# Altium PCB lagd_pcb.PcbDoc (part 5 of 7)
Units mm, origin at the board's own origin, x right, y up, seen from the top; angles counter-clockwise.
Board outline 172 x 145 mm, 6 copper layers (Top Layer, Layer 1, Layer 2, Layer 3, Layer 4, Bottom Layer), stack 0.816 mm thick; 588 components, 338 nets, 2165 pads, 565 vias.
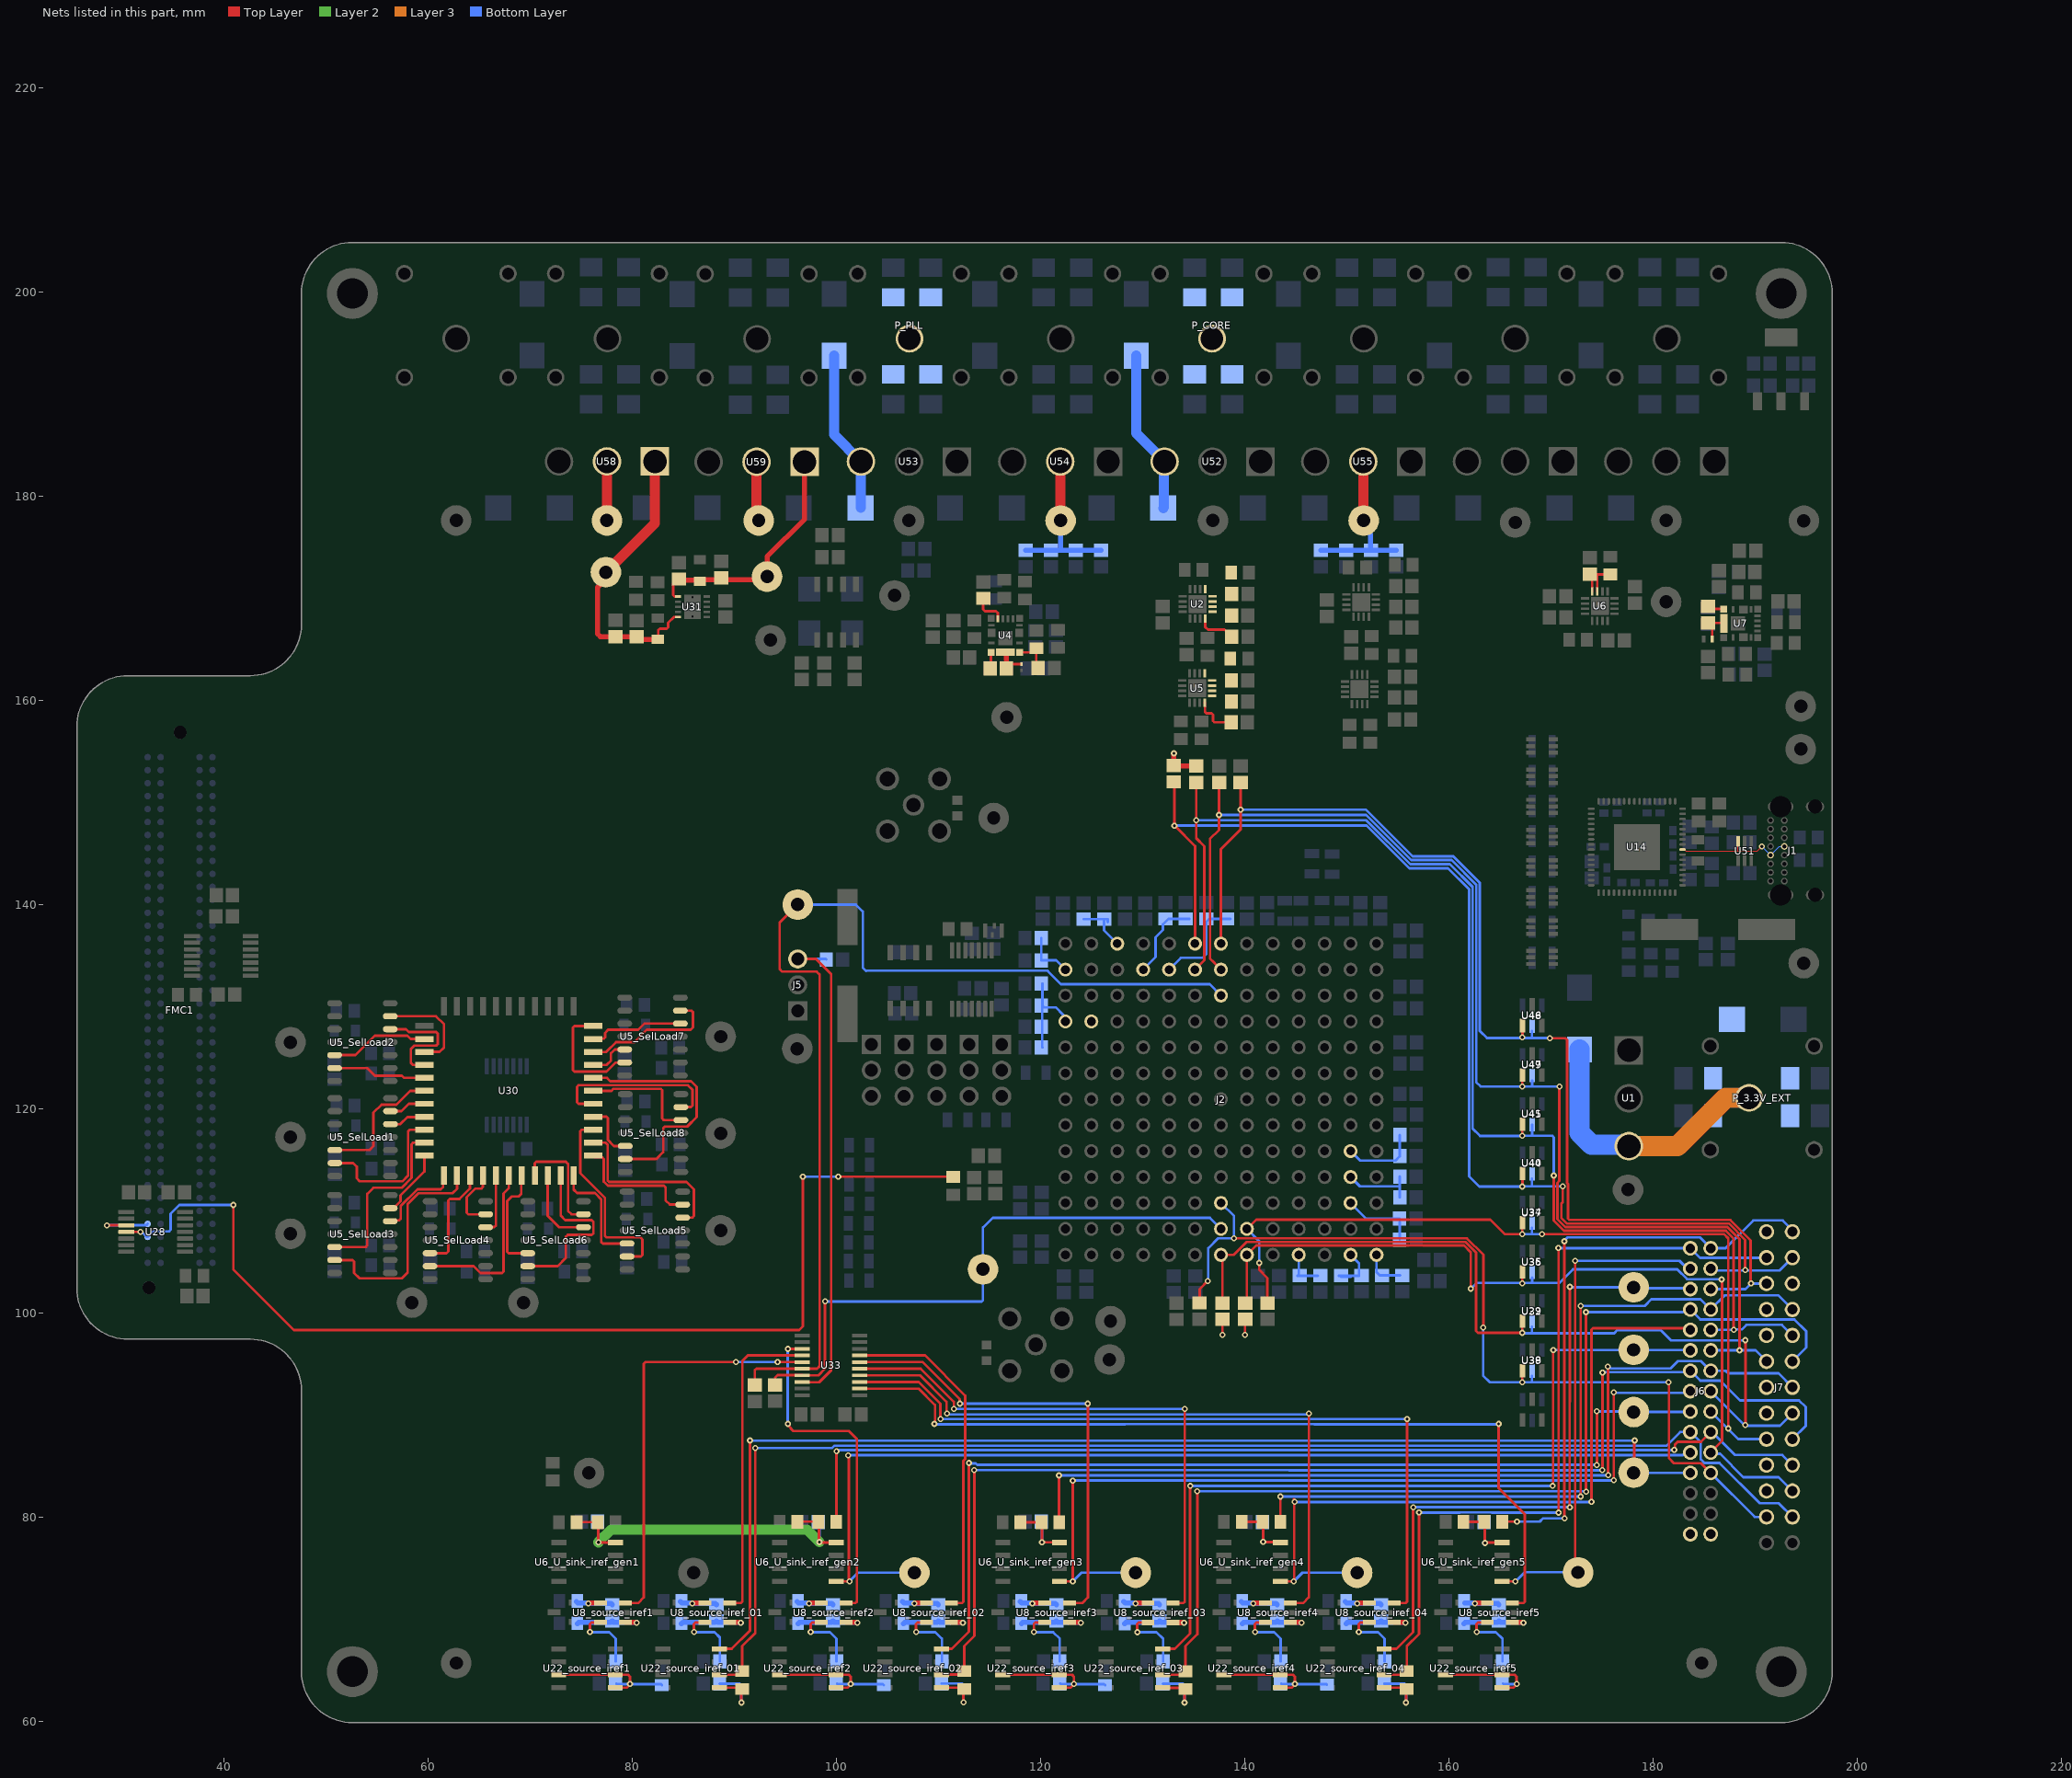
[diagram p8: the nets of this part, all layers, seen from the top]

## Via types
v1: diameter 0.6, hole 0.3, Top Layer to Bottom Layer, tented both sides, 505 vias
v2: diameter 0.3, hole 0.3, Top Layer to Bottom Layer, 20 vias
v3: diameter 0.55, hole 0.3, Top Layer to Bottom Layer, tented both sides, 18 vias
v4: diameter 0.55, hole 0.2, Top Layer to Bottom Layer, 16 vias
v5: diameter 0.6/0.6/0.6/0.6/0.6/0.6 (per signal layer), hole 0.3, Top Layer to Bottom Layer, tented both sides, 2 vias
v6: diameter 0.55/0.55/0.55/0.55/0.55/0.55 (per signal layer), hole 0.3, Top Layer to Bottom Layer, tented both sides, 2 vias
v7: diameter 1, hole 0.5, Top Layer to Bottom Layer, tented both sides, 2 vias

## Nets (pads, with @x,y where several pads share a name; then routed paths per layer and width w, separated by ;. In a path a pad name is that pad's centre, name@x,y a point inside that pad or via, vN(x,y) a via of type N, cw(c..) or ccw(c..) an arc to the next point about the centre after c; other vN are vias at no path point) (continued)
D_P: J1.4 J1.13 U14.8 U51.6 | length 11.8
  Top Layer w0.11: U14.8@182.893,145.385 183.096,145.385 183.227,145.254 188.325,145.254 188.326,145.255 U51.6@188.326,146.183 ; 188.327,145.254 190.229,145.254 v5(190.65,145.675)
  Bottom Layer w0.11: v5(190.65,145.675) 190.665,145.675 191.501,144.84 J1.4@191.516,144.84 192.366,145.69 J1.13@192.866,145.69
DAC_CS*: FMC1.H38 R40.2 U28.4 | length 107.1
  Top Layer w0.25: U28.4@30.372,107.931 30.375,107.928 31.797,107.928 v1(31.8,107.925) ; v1(40.9,110.575) 40.9,104.25 46.825,98.325 96.35,98.325 96.7,98.675 v1(96.7,113.35) ; v1(100.169,113.331) 111.401,113.331 R40.2@111.417,113.314
  Bottom Layer w0.25: v1(31.8,107.925) 31.895,107.925 32.012,107.808 32.04,107.808 32.406,107.442 FMC1.H38@32.512,107.442 33.057,107.987 34.615,107.987 34.762,108.133 34.762,109.712 35.625,110.575 v1(40.9,110.575) ; v1(96.7,113.35) 96.709,113.341 100.159,113.341 v1(100.169,113.331)
DAC_O1: U8_source_iref5.3 U33.2 | length 85
  Top Layer w0.25: U33.2@102.275,92.575 108.05,92.575 109.65,90.975 109.65,89.188 v1(109.587,89.125) ; v1(164.875,89.125) 164.875,82.837 167.437,80.275 167.437,71.716 167.291,71.57 U8_source_iref5.3@166.202,71.57
  Bottom Layer w0.25: v1(109.587,89.125) 109.637,89.075 128.256,89.075 128.281,89.1 146.787,89.1 146.812,89.075 164.825,89.075 v1(164.875,89.125)
DAC_O2: U8_source_iref_04.3 U33.3 | length 75.2
  Top Layer w0.25: U33.3@102.275,93.225 108.064,93.225 110.175,91.114 110.175,89.624 v1(110.199,89.6) ; U8_source_iref_04.3@154.652,71.57 155.748,71.57 155.895,71.716 155.895,89.595 v1(155.9,89.6)
  Bottom Layer w0.25: v1(110.199,89.6) v1(155.9,89.6)
DAC_O3: U8_source_iref4.3 U33.4 | length 66.3
  Top Layer w0.25: U33.4@102.275,93.875 108.175,93.875 110.775,91.275 110.775,90.191 v1(110.841,90.125) ; U8_source_iref4.3@144.477,71.57 145.72,71.57 146.275,72.125 v1(146.275,90.125)
  Bottom Layer w0.25: v1(110.841,90.125) 110.908,90.058 146.208,90.058 v1(146.275,90.125)
DAC_O4: U8_source_iref_03.3 U33.5 | length 53.9
  Top Layer w0.25: U33.5@102.338,94.525 108.25,94.525 111.495,91.28 v1(111.495,90.583) ; U8_source_iref_03.3@132.953,71.567 133.979,71.567 134.125,71.714 v1(134.125,90.583)
  Bottom Layer w0.25: v1(111.495,90.583) v1(134.125,90.583)
DAC_O5: U8_source_iref3.3 U33.6 | length 45.3
  Top Layer w0.25: U33.6@102.275,95.175 108.45,95.175 112.075,91.55 112.075,91.12 v1(112.087,91.108) ; U8_source_iref3.3@122.827,71.57 124.07,71.57 124.625,72.125 v1(124.625,91.108)
  Bottom Layer w0.25: v1(112.087,91.108) v1(124.625,91.108)
DAC_O6: U8_source_iref_02.3 U33.7 | length 33.4
  Top Layer w0.25: U33.7@102.3,95.825 108.675,95.825 112.612,91.888 112.612,85.679 112.428,85.495 112.428,71.716 112.281,71.57 U8_source_iref_02.3@111.277,71.57
DAC_O7: U8_source_iref2.3 U33.13 | length 33.3
  Top Layer w0.25: v1(95.225,89.125) 95.225,89.03 95.526,88.729 95.526,88.649 95.75,88.425 101.2,88.425 102,87.625 102,71.716 101.854,71.57 U8_source_iref2.3@100.952,71.57 ; v1(95.225,96.475) U33.13@96.636,96.475
  Bottom Layer w0.25: v1(95.225,89.125) v1(95.225,96.475)
DAC_O8: U8_source_iref_01.3 U33.14 | length 31
  Top Layer w0.25: U8_source_iref_01.3@89.527,71.57 90.623,71.57 90.77,71.716 90.77,95.27 91.325,95.825 U33.14@96.636,95.825
DAC_O9: U8_source_iref1.3 U33.15 | length 40.5
  Top Layer w0.25: U8_source_iref1.3@79.327,71.57 80.57,71.57 81.125,72.125 81.125,95.029 81.271,95.175 v1(90.15,95.175) ; v1(94.225,95.175) U33.15@96.636,95.175
  Bottom Layer w0.25: v1(90.15,95.175) v1(94.225,95.175)
DAC_O10: C207.2 GV0.1 J2.L7 U33.16 | length 105.9
  Top Layer w0.25: C207.2@92,92.925 92,94.379 92.146,94.525 U33.16@96.636,94.525 ; GV0.1@96.2,140 94.425,138.225 94.425,133.675 94.675,133.425 98.05,133.425 98.35,133.125 98.35,94.775 98.1,94.525 U33.16@96.675,94.525
  Bottom Layer w0.25: GV0.1@96.2,140 101.9,140 102.575,139.325 102.575,133.827 102.893,133.509 120.552,133.525 120.657,133.525 120.73,133.452 121.992,132.189 136.562,132.189 J2.L7@137.667,131.084
DAC_O11: C208.2 GV1.1 J2.B7 U33.17 | length 59.4
  Top Layer w0.25: C208.2@93.975,92.95 93.97,93.475 93.97,93.645 94.225,93.9 96.611,93.9 U33.17@96.636,93.875 98.225,93.875 98.875,94.525 v1(98.875,101.125)
  Bottom Layer w0.25: v1(98.875,101.125) 98.9,101.1 114.204,101.1 114.35,101.246 114.35,108.35 115.3,109.3 136.592,109.3 J2.B7@137.667,108.224
DAC_O12: C206.2 J5.3 U33.18 | length 48.8
  Top Layer w0.25: J5.3@96.2,134.665 97.985,134.665 99.475,133.175 99.475,94.375 98.3,93.2 U33.18@96.65,93.2
  Bottom Layer w0.25: J5.3@96.2,134.665 98.96,134.665 C206.2@99,134.625
DAC_SDIN: FMC1.H37 U28.3 | length 5.9
  Top Layer w0.25: v1(28.525,108.575) 28.528,108.578 30.369,108.578 U28.3@30.372,108.581
  Bottom Layer w0.25: v1(28.525,108.575) 32.375,108.575 32.437,108.637 FMC1.H37@32.512,108.712
Galena_1_0V75: C143.2 C145.2 C146.2 C147.2 C148.2 C149.2 C150.2 C151.2 C152.2 C153.2 C154.2 C155.2 C156.2 C157.2 C158.2 C159.2 C160.2 C161.2 J2.K1 J2.K2 J2.M1 J2.M4 J2.M5 J2.N3 U54.2 VDDA1.1 | length 57.1
  Top Layer w0.5: v1(133.067,154.814) 133.055,154.802 133.055,153.626 C143.2@133.043,153.614 133.068,153.589 135.217,153.589 C161.2@135.242,153.564
  Top Layer w1: U54.2@121.921,183.39 121.94,183.37 121.94,177.634 VDDA1.1@121.96,177.615
  Bottom Layer w0.25: C151.2@120.065,136.708 C152.2@120.065,134.528 121.523,134.528 J2.M1@122.427,133.624 ; C150.2@120.153,130.089 120.153,126.019 C148.2@120.168,126.004 ; C149.2@120.165,132.268 120.167,132.266 120.167,130.089 120.331,129.926 121.481,129.926 122.213,129.194 122.213,128.759 J2.K1@122.427,128.544 ; C146.2@124.217,138.564 C145.2@126.217,138.564 ; C145.2@126.567,138.264 126.567,138.564 C145.2@126.217,138.564 ; J2.N3@127.507,136.164 126.217,137.454 C145.2@126.217,138.564 ; J2.M4@130.047,133.624 131.267,134.844 131.267,136.792 131.985,137.51 131.985,138.067 132.51,138.592 132.56,138.592 132.562,138.589 C153.2@134.217,138.589 C153.2@134.567,138.589 ; J2.M5@132.587,133.624 133.738,134.775 135.85,134.775 136.217,135.142 136.217,138.289 136.517,138.589 C156.2@138.242,138.589 C156.2@138.592,138.589
  Bottom Layer w0.5: C160.2@118.546,174.689 C159.2@121.004,174.689 C158.2@123.462,174.689 C157.2@125.92,174.689 ; 121.96,174.963 VDDA1.1@121.96,177.615
Galena_2_0V75: C162.2 C163.2 C164.2 C165.2 C166.2 C167.2 C168.2 C169.2 C170.2 C171.2 C172.2 C173.2 C174.2 C175.2 C176.2 C177.2 C182.2 C183.2 J2.A10 J2.A12 J2.A13 J2.C12 J2.D12 J2.E12 U55.2 VDDA2.1 | length 55
  Top Layer w0.25: v1(137.817,97.844) C182.2@137.817,99.365 ; v1(140.017,97.844) 140.017,99.34 C183.2@140.042,99.365
  Top Layer w1: U55.2@151.611,183.39 151.63,183.37 151.63,177.634 VDDA2.1@151.65,177.615
  Bottom Layer w0.25: C162.2@145.167,103.639 C162.2@145.292,103.639 ; C162.2@145.287,103.644 C162.2@145.292,103.639 ; C162.2@145.287,103.76 J2.A10@145.287,105.684 ; C163.2@147.167,103.639 C162.2@145.392,103.639 C162.2@145.292,103.639 ; C164.2@149.216,103.637 C164.2@149.341,103.637 ; J2.A12@150.367,105.684 151.19,104.861 151.19,103.637 150.392,103.637 ; J2.C12@150.367,110.764 151.906,109.226 C169.2@155.169,109.226 C168.2@155.169,107.179 ; J2.D12@150.367,113.304 151.282,112.389 155.193,112.389 ; J2.E12@150.367,115.844 151.297,114.914 154.778,114.914 155.192,115.329 C173.2@155.192,117.426 ; J2.A13@152.907,105.684 152.907,103.974 153.217,103.664 C166.2@153.442,103.664 C167.2@155.217,103.664 ; C170.2@155.193,111.304 155.193,112.389 ; C171.2@155.193,113.351 155.193,112.389 ; C164.2@149.341,103.637 C164.2@149.441,103.637 150.392,103.637 ; C164.2@149.341,103.637 149.443,103.536 150.392,103.536 150.392,103.637
  Bottom Layer w0.5: C177.2@147.468,174.689 C176.2@149.926,174.689 C175.2@152.334,174.689 ; VDDA2.1@152.334,176.93 152.128,176.724 152.128,176.46 152.334,176.253 C175.2@152.334,174.689 ; C174.2@154.842,174.689 C175.2@152.384,174.689 C175.2@152.334,174.689
  Bottom Layer w1: VDDA2.1@151.65,177.615 VDDA2.1@152.032,177.232
HD0_1k: U5_SelLoad5.13 U30.9 | length 19.5
  Top Layer w0.25: U30.9@76.18,117.94 75.046,117.94 74.9,117.794 74.9,113.675 77.3,111.275 77.3,107.546 77.446,107.4 80.775,107.4 80.975,107.2 80.975,105.671 80.829,105.525 U5_SelLoad5.13@79.475,105.525
HD0_1M: U5_SelLoad5.12 U30.6 | length 11.3
  Top Layer w0.25: U30.6@74.25,113.47 74.25,112.075 74.575,111.75 76.325,111.75 76.95,111.125 76.95,106.941 77.096,106.795 U5_SelLoad5.12@79.475,106.795
HD0_10k: U5_SelLoad5.5 U30.8 | length 17.6
  Top Layer w0.25: U30.8@76.18,116.67 77.38,116.67 77.575,116.475 77.575,112.971 77.721,112.825 85.3,112.825 86.025,112.1 86.025,109.481 85.879,109.335 U5_SelLoad5.5@84.925,109.335
HD0_100k: U5_SelLoad5.6 U30.7 | length 12.8
  Top Layer w0.25: U30.7@76.18,115.4 76.348,115.233 77.054,115.233 77.2,115.086 77.2,112.851 77.601,112.45 83.104,112.45 83.25,112.304 83.25,111.025 83.67,110.605 U5_SelLoad5.6@84.925,110.605
HD1_1k: U5_SelLoad1.13 U30.37 | length 14.8
  Top Layer w0.25: U5_SelLoad1.13@50.85,114.675 52.65,114.675 53,114.325 53,113.175 53.295,112.88 57.455,112.88 58.025,113.45 58.025,117.769 58.196,117.94 U30.37@59.62,117.94
HD1_1M: U5_SelLoad1.12 U30.34 | length 13.1
  Top Layer w0.25: U5_SelLoad1.12@50.85,115.945 54.245,115.945 54.63,116.33 54.63,119.609 55.421,120.4 56.875,120.4 58.225,121.75 U30.34@59.62,121.75
HD1_10k: U5_SelLoad1.5 U30.36 | length 3.6
  Top Layer w0.25: U5_SelLoad1.5@56.3,118.485 57.26,118.485 57.957,119.182 59.592,119.182 U30.36@59.62,119.21
HD1_100k: U5_SelLoad1.6 U30.35 | length 3.6
  Top Layer w0.25: U5_SelLoad1.6@56.3,119.755 57.38,119.755 58.105,120.48 U30.35@59.62,120.48
HDI0+: C216_source_iref1.2 C216_source_iref2.2 C216_source_iref3.2 C216_source_iref4.2 C216_source_iref5.2 C216_source_iref_01.2 C216_source_iref_02.2 C216_source_iref_03.2 C216_source_iref_04.2 C243_source_iref1.2 C243_source_iref2.2 C243_source_iref3.2 C243_source_iref4.2 C243_source_iref5.2 C243_source_iref_01.2 C243_source_iref_02.2 C243_source_iref_03.2 C243_source_iref_04.2 J6.29 J7.5 J7.10 J7.16 J7.22 R53.2 R54.2 R61.2 R62.2 R63.2 R64.2 R65.2 R66.2 U8_source_iref1.5 U8_source_iref2.5 U8_source_iref3.5 U8_source_iref4.5 U8_source_iref5.5 U8_source_iref_01.5 U8_source_iref_02.5 U8_source_iref_03.5 U8_source_iref_04.5 U22_source_iref1.3 U22_source_iref1.5 U22_source_iref1.6 U22_source_iref2.3 U22_source_iref2.5 U22_source_iref2.6 U22_source_iref3.3 U22_source_iref3.5 U22_source_iref3.6 U22_source_iref4.3 U22_source_iref4.5 U22_source_iref4.6 U22_source_iref5.3 U22_source_iref5.5 U22_source_iref5.6 U22_source_iref_01.5 U22_source_iref_02.5 U22_source_iref_03.5 U22_source_iref_04.5 U58.2 VDD9V.1 | length 165.2
  Top Layer w0.25: U22_source_iref1.3@72.769,64.53 U22_source_iref1.3@72.787,64.548 U22_source_iref1.6@78.324,64.548 79.577,64.548 79.762,64.363 v1(79.762,63.637) 79.762,63.604 79.436,63.278 U22_source_iref1.5@78.324,63.278 ; v1(75.85,68.725) 75.837,68.738 75.837,69.523 75.983,69.67 U8_source_iref1.5@76.888,69.67 ; v1(86.05,68.725) 86.037,68.738 86.037,69.523 86.183,69.67 U8_source_iref_01.5@87.088,69.67 ; U22_source_iref_01.5@88.524,63.278 R53.2@90.925,63.278 ; v1(90.675,61.825) R53.2@90.675,63.028 ; U22_source_iref2.3@94.394,64.53 U22_source_iref2.3@94.412,64.548 U22_source_iref2.6@99.949,64.548 101.202,64.548 101.387,64.363 v1(101.387,63.637) 101.387,63.604 101.061,63.278 U22_source_iref2.5@99.949,63.278 ; v1(97.475,68.725) 97.462,68.738 97.462,69.523 97.608,69.67 U8_source_iref2.5@98.513,69.67 ; v1(107.8,68.725) 107.787,68.738 107.787,69.523 107.933,69.67 U8_source_iref_02.5@108.838,69.67 ; U22_source_iref_02.5@110.274,63.278 110.285,63.289 R65.2@112.686,63.289 ; v1(112.436,61.836) R65.2@112.436,63.039 ; U22_source_iref3.3@116.269,64.53 U22_source_iref3.3@116.287,64.548 U22_source_iref3.6@121.824,64.548 123.077,64.548 123.262,64.363 v1(123.262,63.637) 123.262,63.604 122.936,63.278 U22_source_iref3.5@121.824,63.278 ; v1(119.35,68.725) 119.337,68.738 119.337,69.523 119.483,69.67 U8_source_iref3.5@120.388,69.67 ; v1(129.476,68.723) 129.463,68.736 129.463,69.521 129.609,69.667 U8_source_iref_03.5@130.514,69.667 ; U22_source_iref_03.5@131.986,63.312 U22_source_iref_03.5@131.95,63.275 R62.2@134.351,63.275 ; v1(134.101,61.823) R62.2@134.101,63.025 ; U22_source_iref4.3@137.919,64.53 U22_source_iref4.3@137.937,64.548 U22_source_iref4.6@143.474,64.548 144.727,64.548 144.912,64.363 v1(144.912,63.637) 144.912,63.604 144.586,63.278 U22_source_iref4.5@143.474,63.278 ; v1(141,68.725) 140.987,68.738 140.987,69.523 141.133,69.67 U8_source_iref4.5@142.038,69.67 ; v1(151.175,68.725) 151.162,68.738 151.162,69.523 151.308,69.67 U8_source_iref_04.5@152.213,69.67 ; U22_source_iref_04.5@153.649,63.278 156.05,63.278 155.8,63.028 v1(155.8,61.825) ; U22_source_iref5.3@159.644,64.53 U22_source_iref5.3@159.662,64.548 U22_source_iref5.6@165.199,64.548 166.452,64.548 166.637,64.363 v1(166.637,63.637) 166.637,63.604 166.311,63.278 U22_source_iref5.5@165.199,63.278 ; v1(162.725,68.725) 162.712,68.738 162.712,69.523 162.858,69.67 U8_source_iref5.5@163.763,69.67
  Top Layer w1: VDD9V.1@77.508,177.625 U58.2@77.508,183.4
  Bottom Layer w0.25: v1(75.85,68.725) 77.725,68.725 78.375,68.075 C216_source_iref1.2@78.375,65.85 ; C243_source_iref1.2@78.43,63.683 78.476,63.637 v1(79.762,63.637) 82.798,63.637 R54.2@82.893,63.543 ; v1(86.05,68.725) 88.05,68.725 88.575,68.2 C216_source_iref_01.2@88.575,65.85 ; C243_source_iref_01.2@88.55,63.675 90.529,63.675 90.675,63.529 v1(90.675,61.825) ; v1(97.475,68.725) 99.35,68.725 100,68.075 C216_source_iref2.2@100,65.85 ; C243_source_iref2.2@100.055,63.683 100.101,63.637 v1(101.387,63.637) 104.548,63.637 R66.2@104.643,63.543 ; v1(107.8,68.725) 109.675,68.725 110.325,68.075 C216_source_iref_02.2@110.325,65.85 ; C243_source_iref_02.2@110.311,63.686 112.29,63.686 112.436,63.54 v1(112.436,61.836) ; v1(119.35,68.725) 121.225,68.725 121.875,68.075 C216_source_iref3.2@121.875,65.85 ; C243_source_iref3.2@121.93,63.683 121.976,63.637 v1(123.262,63.637) 126.222,63.637 R64.2@126.318,63.54 ; v1(129.476,68.723) 131.351,68.723 132.001,68.073 C216_source_iref_03.2@132.001,65.848 ; C243_source_iref_03.2@131.976,63.673 133.954,63.673 134.101,63.526 v1(134.101,61.823) ; v1(141,68.725) 142.875,68.725 143.525,68.075 C216_source_iref4.2@143.525,65.85 ; C243_source_iref4.2@143.58,63.683 143.626,63.637 v1(144.912,63.637) 147.988,63.637 R63.2@148.05,63.575 ; v1(151.175,68.725) 153.05,68.725 153.7,68.075 C216_source_iref_04.2@153.7,65.85 ; C243_source_iref_04.2@153.675,63.675 155.654,63.675 155.8,63.529 v1(155.8,61.825) ; v1(162.725,68.725) 164.6,68.725 165.25,68.075 C216_source_iref5.2@165.25,65.85 ; C243_source_iref5.2@165.305,63.683 165.351,63.637 v1(166.637,63.637)
HDI0-: J6.8 J7.11 R62.1 U22_source_iref_03.6 | length 101.8
  Top Layer w0.25: U22_source_iref_03.6@131.95,64.545 R62.1@133.823,64.545 ; R62.1@134.176,64.898 134.176,67.348 135.35,68.522 v1(135.35,82.525) ; v1(173.425,100.075) 173.437,100.062 173.437,82.488 v1(173.45,82.475)
  Bottom Layer w0.25: v1(135.35,82.525) 173.4,82.525 v1(173.45,82.475) ; v1(173.425,100.075) 182.909,100.075 182.931,100.098 183.425,100.098 J6.8@183.654,100.327 184.631,99.35 193.85,99.35 195,98.2 195,96.593 J7.11@193.655,95.248
HDI0i: C178.2 J2.M7 J6.11 J7.12 U47.1 U49.3 | length 125
  Top Layer w0.25: C178.2@137.492,151.964 137.475,151.947 137.475,147.3 136.592,146.417 136.592,134.714 137.017,134.289 137.017,134.274 J2.M7@137.667,133.624 ; v1(167.199,122.176) U47.1@167.198,123.19 ; v1(170.825,122.175) 170.825,112.942 170.625,112.742 170.625,109.182 171.407,108.4 187.285,108.4 188.477,107.208 v1(188.477,96.327)
  Bottom Layer w0.25: v1(137.475,148.775) 151.89,148.775 156.315,144.35 160.275,144.35 162.675,141.95 162.675,122.6 163.099,122.176 v1(167.199,122.176) 168.15,122.176 ; U49.3@168.15,122.759 168.15,122.176 ; v1(170.825,122.175) 170.824,122.176 168.15,122.176 ; J6.11@185.654,96.327 v1(188.477,96.327) 190.036,96.327 J7.12@191.115,95.248
HDI0o: HD0.1 J6.12 U22_source_iref_03.8 | length 80.1
  Top Layer w0.25: U22_source_iref_03.8@131.95,67.085 133.163,67.085 134.65,68.572 v1(134.65,83.05) ; v1(170.175,83.05) 170.2,83.075 170.2,96.325 v1(170.225,96.35) ; HD0.1@178.1,96.375 HD0.1@178.124,96.351 ; J6.12@183.63,96.351 J6.12@183.654,96.327
  Bottom Layer w0.25: v1(134.65,83.05) v1(170.175,83.05) ; v1(170.225,96.35) 170.238,96.362 178.088,96.362 HD0.1@178.1,96.375 ; HD0.1@178.1,96.351 J6.12@183.63,96.351
HDI1-: J6.20 J7.23 R53.1 U22_source_iref_01.6 | length 130.9
  Top Layer w0.25: U22_source_iref_01.6@88.524,64.548 R53.1@90.398,64.548 ; R53.1@90.75,64.9 90.75,67.35 92.05,68.65 v1(92.05,86.75)
  Bottom Layer w0.25: v1(92.05,86.75) 99.558,86.75 99.783,86.975 181.317,86.975 182.669,88.327 J6.20@183.654,88.327 184.675,87.306 184.675,85.65 185.025,85.3 186.505,85.3 190.455,81.35 192.313,81.35 J7.23@193.655,80.008
HDI1i: C184.2 J2.C7 J6.23 J7.24 U38.1 U39.3 | length 88.6
  Top Layer w0.25: C184.2@135.575,100.975 135.575,102.328 v1(136.358,103.111) ; v1(138.955,107.295) 161.77,107.295 163.375,105.69 163.375,98.601 v1(163.35,98.576) ; U38.1@167.198,93.834 167.198,93.201 v1@167.199,93.2 ; v1(181.525,93.2) 181.55,93.175 181.55,85.775 182.049,85.276 184.705,85.276 J6.23@185.654,84.327
  Bottom Layer w0.25: v1@136.425,103.1 136.425,106.35 137.375,107.3 v1@138.95,107.3 ; J2.C7@137.667,110.764 138.95,109.482 v1@138.95,107.3 ; v1(138.955,107.295) v1@138.95,107.3 ; v1(163.35,98.576) 163.35,93.85 164,93.2 v1(167.2,93.2) 168.125,93.2 ; U39.3@168.125,93.809 168.125,93.2 ; v1(181.525,93.2) 168.125,93.2 ; J6.23@185.654,84.327 189.973,80.008 J7.24@191.115,80.008
HDI1o: HD1.1 J6.24 U22_source_iref_01.8 | length 117.8
  Top Layer w0.25: U22_source_iref_01.8@88.524,67.088 89.738,67.088 91.525,68.875 v1(91.525,87.5) ; HD1.1@178.1,84.336 178.15,84.386 178.15,87.45 v1(178.2,87.5)
  Bottom Layer w0.25: v1(91.525,87.5) 91.55,87.475 178.175,87.475 v1(178.2,87.5) ; HD1.1@178.1,84.336 178.105,84.332 183.649,84.332 J6.24@183.654,84.327
HU0_1k: U5_SelLoad6.13 U30.5 | length 17.5
  Top Layer w0.25: U5_SelLoad6.13@69.75,104.575 72.675,104.575 73.475,105.375 73.475,107.45 73.665,107.64 76.029,107.64 76.175,107.786 76.175,108.929 76.029,109.075 73.425,109.075 72.98,109.52 U30.5@72.98,113.47
HU0_1M: U5_SelLoad6.12 U30.2 | length 10.6
  Top Layer w0.25: U30.2@69.17,113.47 69.114,113.414 69.114,111.664 68.85,111.4 68.175,111.4 67.725,110.95 67.725,105.991 67.871,105.845 U5_SelLoad6.12@69.75,105.845
HU0_10k: U5_SelLoad6.5 U30.4 | length 7.9
  Top Layer w0.25: U30.4@71.71,113.47 71.71,109.515 72.84,108.385 U5_SelLoad6.5@75.2,108.385
HU0_100k: U5_SelLoad6.6 U30.3 | length 10.8
  Top Layer w0.25: U30.3@70.44,113.47 70.44,114.654 70.586,114.8 73.475,114.8 73.7,114.575 73.7,110 74.045,109.655 U5_SelLoad6.6@75.2,109.655
HU1_1k: U5_SelLoad2.13 U30.33 | length 9.2
  Top Layer w0.25: U5_SelLoad2.13@50.825,123.975 54.043,123.975 54.788,123.23 57.42,123.23 57.63,123.02 U30.33@59.62,123.02
HU1_1M: U5_SelLoad2.12 U30.30 | length 9.7
  Top Layer w0.25: U5_SelLoad2.12@50.825,125.245 52.87,125.245 54.775,127.15 57.95,127.15 58.27,126.83 U30.30@59.62,126.83
HU1_10k: U5_SelLoad2.5 U30.32 | length 11.5
  Top Layer w0.25: U5_SelLoad2.5@56.275,127.785 57.815,127.785 58.1,127.5 60.779,127.5 60.925,127.354 60.925,126.321 60.779,126.175 58.625,126.175 58.3,125.85 58.3,124.475 58.485,124.29 U30.32@59.62,124.29
HU1_100k: U5_SelLoad2.6 U30.31 | length 10
  Top Layer w0.25: U5_SelLoad2.6@56.275,129.055 60.77,129.055 61.55,128.275 61.55,126 61.11,125.56 U30.31@59.62,125.56
HUI0+: J6.7 J7.7 R56.1 | length 73.1
  Top Layer w0.25: R56.1@143.5,79.525 v1(143.5,82) ; v1(172.9,82) v1(172.9,100.675)
  Bottom Layer w0.25: v1(143.5,82) v1(172.9,82) ; v1(172.9,100.675) 179.175,100.675 179.825,101.325 184.656,101.325 J6.7@185.654,100.327 187.052,101.725 192.258,101.725 J7.7@193.655,100.328
HUI0-: C242_u_sink_iref_gen1.2 C242_u_sink_iref_gen2.2 C242_u_sink_iref_gen3.2 C242_U_sink_iref_gen4.2 C242_u_sink_iref_gen5.2 J6.30 J7.2 J7.8 J7.14 J7.20 R51.2 R52.1 R55.2 R56.2 R57.2 R58.1 R59.1 R60.1 R67.2 R68.1 U6_U_sink_iref_gen1.8 U6_U_sink_iref_gen2.8 U6_U_sink_iref_gen3.8 U6_U_sink_iref_gen4.8 U6_U_sink_iref_gen5.8 U59.2 VSSm3V.1 | length 67.4
  Top Layer w0.25: R68.1@74.549,79.499 R67.2@76.649,79.499 ; R67.2@76.65,79.449 76.65,77.55 v1(76.675,77.525) ; v1@76.895,77.505 U6_U_sink_iref_gen1.8@78.419,77.505 ; R52.1@96.174,79.549 R51.2@98.274,79.549 ; R51.2@98.275,79.499 98.275,77.6 v1(98.325,77.55) ; v1@98.52,77.505 U6_U_sink_iref_gen2.8@100.044,77.505 ; R60.1@118.024,79.474 R57.2@120.124,79.474 ; R57.2@120.125,79.424 v1(120.125,77.525) 120.135,77.515 121.909,77.515 U6_U_sink_iref_gen3.8@121.919,77.505 ; R59.1@139.7,79.525 R56.2@141.8,79.525 ; R56.2@141.75,79.525 141.801,79.474 141.801,77.576 v1(141.808,77.567) ; v1(141.808,77.567) 141.839,77.536 143.538,77.536 U6_U_sink_iref_gen4.8@143.569,77.505 ; R58.1@161.425,79.525 163.325,79.525 163.525,79.325 v1(163.525,77.45) 163.58,77.505 U6_U_sink_iref_gen5.8@165.294,77.505
  Top Layer w1: U59.2@92.172,183.364 92.172,177.832 VSSm3V.1@92.378,177.625
  Layer 2 w1: v1(76.675,77.525) 77.925,78.775 97.1,78.775 v1(98.325,77.55)
  Bottom Layer w0.25: C242_u_sink_iref_gen1.2@76.6,79.55 76.675,79.475 v1(76.675,77.525) ; C242_u_sink_iref_gen2.2@98.2,79.525 98.325,79.4 v1(98.325,77.55) ; C242_u_sink_iref_gen3.2@120.075,79.55 120.125,79.5 v1(120.125,77.525) ; C242_U_sink_iref_gen4.2@141.725,79.525 141.808,79.442 v1(141.808,77.567) ; v1@163.506,77.469 C242_u_sink_iref_gen5.2@163.506,79.469
  Bottom Layer w0.5: C242_u_sink_iref_gen5.2@163.45,79.525 C242_u_sink_iref_gen5.2@163.506,79.469 ; v1@163.506,77.469 v1(163.525,77.45)
HUI0i: C161.1 J2.M6 J6.9 J7.9 U41.1 U45.3 | length 127
  Top Layer w0.25: J2.M6@135.127,133.624 136.038,134.535 136.038,145.712 135.25,146.5 v1(135.25,148.25) 135.25,151.957 C161.1@135.242,151.964 ; v1(167.199,117.351) U41.1@167.198,118.365 ; v1(170.275,113.45) 170.275,109.037 171.262,108.05 187.14,108.05 187.9,107.29 v1(187.9,98.35)
  Bottom Layer w0.25: v1(135.25,148.25) 151.92,148.25 156.22,143.95 160.1,143.95 162.325,141.725 162.325,118.05 163.05,117.325 167.199,117.325 167.224,117.35 168.15,117.35 170.129,117.35 170.275,117.204 v1(170.275,113.45) ; 168.15,117.375 U45.3@168.15,118.434 ; J6.9@185.654,98.327 185.665,98.338 187.888,98.338 v1(187.9,98.35) 187.925,98.375 188.7,98.375 189.15,98.825 192.618,98.825 J7.9@193.655,97.788
HUI0o: HU0.1 J6.10 U6_U_sink_iref_gen4.5 | length 71.9
  Top Layer w0.25: U6_U_sink_iref_gen4.5@143.494,73.695 v1(144.795,73.695) 144.835,73.735 144.835,81.435 v1(144.875,81.475) ; v1@144.795,81.73 144.808,81.717 144.808,81.489 v1@144.823,81.475 ; v1(173.975,81.5) 173.975,98.354 174.121,98.5 183.481,98.5 J6.10@183.654,98.327
  Bottom Layer w0.25: v1(144.795,73.695) 145.65,74.55 HU0.1@151.008,74.55 HU0.1@151.158,74.55 ; v1(144.875,81.475) 173.95,81.475 v1(173.975,81.5)
HUI1+: J6.19 J7.19 R51.1 | length 102.8
  Top Layer w0.25: R51.1@99.974,79.549 100,79.575 v1(100,86.45) ; v1(182.075,86.586) 182.142,86.653 182.142,87.106 182.414,87.378 184.705,87.378 J6.19@185.654,88.327
  Bottom Layer w0.25: v1(100,86.45) 100.095,86.45 100.195,86.55 182.039,86.55 v1(182.075,86.586) ; J6.19@185.798,88.327 188.05,86.075 192.668,86.075 J7.19@193.655,85.088
HUI1i: C183.1 J2.A8 J6.21 J7.21 U35.1 U36.3 | length 85.1
  Top Layer w0.25: C183.1@140.042,100.964 140.207,101.13 J2.A8@140.207,105.684 141.118,106.595 161.48,106.595 162.138,105.937 v1(162.138,102.363) ; v1(167.199,102.876) U35.1@167.198,103.89 ; J6.21@185.654,86.327 186.775,87.448 186.775,103.208 v1(186.716,103.266)
  Bottom Layer w0.25: v1(162.138,102.363) 162.7,102.925 168.15,102.925 ; U36.3@168.15,103.459 168.15,102.925 ; J6.21@185.797,86.184 186.566,86.184 188.85,83.9 192.303,83.9 J7.21@193.655,82.548 ; v1(186.716,103.266) 186.683,103.3 183.325,103.3 182.375,104.25 172.15,104.25 170.825,102.925 168.15,102.925
HUI1o: HU1.1 J6.22 U6_U_sink_iref_gen2.5 | length 103
  Top Layer w0.25: U6_U_sink_iref_gen2.5@99.969,73.695 v1(101.27,73.695) 101.21,73.755 101.21,85.965 v1(101.15,86.025)
  Bottom Layer w0.25: v1(101.15,86.025) 101.186,86.061 182.909,86.061 182.945,86.098 183.425,86.098 J6.22@183.654,86.327 ; v1(101.27,73.695) 102.125,74.55 HU1.1@107.633,74.55
JD0_1k: U5_SelLoad7.13 U30.17 | length 11.8
  Top Layer w0.25: U30.17@76.18,128.1 74.321,128.1 74.175,127.954 74.175,123.771 74.321,123.625 77.475,123.625 78.373,124.523 79.248,124.523 U5_SelLoad7.13@79.25,124.525
JD0_1M: U5_SelLoad7.12 U30.14 | length 4.4
  Top Layer w0.25: U30.14@75.837,124.286 77.461,124.286 77.904,124.729 77.904,125.429 78.27,125.795 U5_SelLoad7.12@79.25,125.795
JD0_10k: U5_SelLoad7.5 U30.16 | length 9.4
  Top Layer w0.25: U30.16@76.18,126.83 76.2,126.85 77.179,126.85 77.325,126.996 77.325,127.425 77.625,127.725 80.564,127.725 81.174,128.335 U5_SelLoad7.5@84.7,128.335
JD0_100k: U5_SelLoad7.6 U30.15 | length 13.6
  Top Layer w0.25: U30.15@76.147,125.55 77.425,125.55 78.4,126.525 80.2,126.525 81.4,127.725 85.7,127.725 85.925,127.95 85.925,129.459 85.779,129.605 U5_SelLoad7.6@84.7,129.605
JD1_1k: U5_SelLoad4.13 U30.1 | length 17.2
  Top Layer w0.25: U5_SelLoad4.13@60.175,104.575 64.458,104.575 65.133,103.9 67.229,103.9 67.375,104.046 67.375,111.7 67.9,112.225 U30.1@67.9,113.47
JD1_1M: U5_SelLoad4.12 U30.42 | length 10.5
  Top Layer w0.25: U5_SelLoad4.12@60.175,105.845 61.795,105.845 61.975,106.025 61.975,111.004 62.121,111.15 63.064,111.15 64.09,112.176 U30.42@64.09,113.25
JD1_10k: U5_SelLoad4.5 U30.44 | length 6
  Top Layer w0.25: U5_SelLoad4.5@65.625,108.385 65.64,108.4 66.475,108.4 66.63,108.555 U30.44@66.63,113.47
JD1_100k: U5_SelLoad4.6 U30.43 | length 6.6
  Top Layer w0.25: U30.43@65.36,113.47 65.36,112.321 65.214,112.175 64.625,112.175 63.775,111.325 63.775,109.801 63.921,109.655 U5_SelLoad4.6@65.625,109.655
JDI0-: J6.2 J7.4 R61.1 U22_source_iref_04.6 | length 78.9
  Top Layer w0.25: U22_source_iref_04.6@153.649,64.548 155.523,64.548 R61.1@155.875,64.9 155.875,67.35 157.075,68.55 v1(157.075,80.45) ; v1(170.725,106.35) 170.75,106.325 v1(170.75,80.425) ; J7.4@191.085,105.378 J7.4@191.115,105.408
  Bottom Layer w0.25: v1(157.075,80.45) 157.097,80.428 161.085,80.428 161.107,80.45 164.193,80.45 164.218,80.425 v1(170.75,80.425) ; v1(170.725,106.35) 170.737,106.338 183.642,106.338 184.603,105.378 J7.4@191.085,105.378
JDI0i: C144.2 J2.N7 J6.5 J7.6 U46.1 U48.3 | length 114.4
  Top Layer w0.25: J2.N7@137.667,136.164 137.667,145.417 139.6,147.35 v1(139.6,149.3) 139.6,151.957 C144.2@139.592,151.964 ; v1@167.198,127.002 167.198,127.633 U46.1@167.198,128.015 ; v1(169.9,126.9) 171.404,126.9 171.575,126.729 171.575,112.717 171.675,112.617 171.675,109.246 171.821,109.1 187.575,109.1 189.562,107.113 189.562,102.913 v1(189.6,102.875)
  Bottom Layer w0.25: v1(139.6,149.3) 151.86,149.3 156.435,144.725 160.43,144.725 163.025,142.13 163.025,127.625 163.725,126.925 166.877,126.925 166.887,126.934 167.189,126.934 167.199,126.925 167.208,126.934 167.511,126.934 167.52,126.925 168.124,126.925 ; U48.3@168.124,127.61 168.124,126.925 ; v1(169.9,126.9) 169.875,126.925 168.124,126.925 ; J6.5@185.654,102.327 189.052,102.327 v1(189.6,102.875) J7.6@191.108,102.875
  other v1: 167.199,127.001
JDI0o: J6.6 JD0.1 U22_source_iref_04.8 | length 64.5
  Top Layer w0.25: U22_source_iref_04.8@153.649,67.088 154.863,67.088 156.5,68.725 v1(156.5,80.95) ; v1(171.85,80.95) 171.825,80.975 171.825,91.285 171.85,91.31 v1(171.85,102.55) ; J6.6@183.567,102.413 J6.6@183.654,102.327
  Bottom Layer w0.25: v1(156.5,80.95) 156.525,80.975 171.825,80.975 v1(171.85,80.95) ; v1(171.85,102.55) 171.9,102.5 JD0.1@178.1,102.5 ; JD0.1@178.187,102.413 J6.6@183.567,102.413
JDI1-: J6.14 J7.17 R65.1 U22_source_iref_02.6 | length 118.2
  Top Layer w0.25: U22_source_iref_02.6@110.285,64.559 R65.1@112.159,64.559 ; R65.1@112.511,64.911 112.511,67.361 113.5,68.35 v1(113.5,84.6) ; v1(175.025,84.6) 175.037,84.613 175.037,94.137 v1(175.05,94.15)
  Bottom Layer w0.25: v1(113.5,84.6) 144.331,84.6 144.356,84.575 175,84.575 v1(175.025,84.6) ; v1(175.05,94.15) 175.1,94.2 183.209,94.2 183.336,94.327 J6.14@183.654,94.327 184.631,93.35 186.6,93.35 188.525,91.425 194.3,91.425 194.95,90.775 194.95,88.923 J7.17@193.655,87.628
JDI1i: C185.2 J2.B8 J6.17 J7.18 U34.1 U37.3 | length 82.8
  Top Layer w0.25: J2.B8@140.207,108.224 141.118,109.135 164.065,109.135 165.499,107.701 v1(167.199,107.701) U34.1@167.198,108.334 ; v1(141.417,104.889) 141.417,104.214 142.217,103.414 C185.2@142.217,100.964 ; v1(169.125,107.7) 186.975,107.7 187.375,107.3 v1(187.375,88.675)
  Bottom Layer w0.25: J2.B8@140.207,108.224 141.417,107.014 v1(141.417,104.889) ; v1(167.199,107.701) 168.124,107.701 ; U37.3@168.124,108.31 168.124,107.701 ; v1(169.125,107.7) 169.124,107.701 168.124,107.701 ; J6.17@185.654,90.327 188.353,87.628 J7.18@191.115,87.628
JDI1o: J6.18 JD1.1 U22_source_iref_02.8 | length 96
  Top Layer w0.25: U22_source_iref_02.8@110.274,67.088 111.288,67.088 112.975,68.775 v1(112.975,85.3) ; v1(174.5,85.1) v1(174.5,90.35) ; J6.18@183.628,90.301 J6.18@183.654,90.327
  Bottom Layer w0.25: v1(112.975,85.3) 113.025,85.25 113.65,85.25 113.775,85.125 174.475,85.125 v1(174.5,85.1) ; v1(174.5,90.35) 178.025,90.35 JD1.1@178.1,90.275 ; JD1.1@178.126,90.301 J6.18@183.628,90.301
JU0_1k: U5_SelLoad8.13 U30.13 | length 23.5
  Top Layer w0.25: U30.13@76.18,123.02 77.505,123.02 77.825,122.7 85.753,122.7 86.3,122.153 86.3,119.175 85.375,118.25 83.171,118.25 83.025,118.104 83.025,115.75 82.35,115.075 U5_SelLoad8.13@79.3,115.075
JU0_1M: U5_SelLoad8.12 U30.10 | length 5.5
  Top Layer w0.25: U30.10@76.18,119.21 77.454,119.21 77.6,119.064 77.6,116.945 78.2,116.345 U5_SelLoad8.12@79.3,116.345
JU0_10k: U5_SelLoad8.5 U30.12 | length 11.5
  Top Layer w0.25: U30.12@76.18,121.75 77.95,121.75 78.15,121.95 82.779,121.95 82.925,121.804 82.925,119.031 83.071,118.885 U5_SelLoad8.5@84.75,118.885
JU0_100k: U5_SelLoad8.6 U30.11 | length 17.5
  Top Layer w0.25: U30.11@76.18,120.48 74.721,120.48 74.575,120.626 74.575,122.154 74.721,122.3 85.45,122.3 85.9,121.85 85.9,120.301 85.754,120.155 U5_SelLoad8.6@84.75,120.155
JU1_1k: U5_SelLoad3.13 U30.41 | length 22.3
  Top Layer w0.25: U5_SelLoad3.13@50.825,105.175 52.587,105.175 52.734,105.029 52.734,103.916 53.27,103.38 57.43,103.38 57.975,103.925 57.975,110.635 59.065,111.725 62.4,111.725 62.82,112.145 U30.41@62.82,113.47
JU1_1M: U5_SelLoad3.12 U30.38 | length 17.9
  Top Layer w0.25: U5_SelLoad3.12@50.825,106.445 53.879,106.445 54.025,106.591 54.025,111.65 54.625,112.25 57.4,112.25 58.375,113.225 58.375,116.524 58.521,116.67 U30.38@59.62,116.67
JU1_10k: U5_SelLoad3.5 U30.40 | length 8.5
  Top Layer w0.25: U5_SelLoad3.5@56.275,108.985 56.342,109.052 57.127,109.052 57.3,109.225 57.3,110.455 58.945,112.1 61.218,112.1 61.457,112.339 61.457,113.377 U30.40@61.55,113.47
JU1_100k: U5_SelLoad3.6 U30.39 | length 6.7
  Top Layer w0.25: U5_SelLoad3.6@56.275,110.255 56.605,110.255 57.275,110.925 57.275,111.5 59.62,113.845 U30.39@59.62,115.4
JUI0+: J6.1 J7.1 R55.1 | length 58
  Top Layer w0.25: R55.1@165.225,79.525 165.25,79.55 v1(166.675,79.55) ; v1(171.312,107.003) 171.318,106.997 171.318,79.882 v1(171.325,79.875) ; J7.1@193.655,107.948 J7.1@193.655,108.094
  Bottom Layer w0.25: v1(166.675,79.55) 168.901,79.55 169.226,79.875 v1(171.325,79.875) ; v1(171.312,107.003) 171.312,107.065 171.646,107.4 184.581,107.4 J6.1@185.654,106.327 187.102,106.327 189.825,109.05 192.699,109.05 J7.1@193.655,108.094
JUI0i: C143.1 J2.N6 J6.3 J7.3 U40.1 U44.3 | length 121
  Top Layer w0.25: C143.1@133.043,152.014 133.1,151.958 v1(133.1,147.725) 133.125,147.725 135.127,145.723 J2.N6@135.127,136.164 ; U40.1@167.198,113.54 167.199,113.539 167.199,112.376 v1(167.2,112.375) ; v1(171.15,112.4) 171.15,110.853 171.025,110.728 171.025,109.276 171.551,108.75 187.43,108.75 189.026,107.154 v1(189.026,104.2)
  Bottom Layer w0.25: v1(133.1,147.725) 151.95,147.725 156.125,143.55 159.92,143.55 161.975,141.495 161.975,113.375 162.975,112.375 v1(167.2,112.375) 167.225,112.4 v1(171.15,112.4) ; 168.124,112.521 U44.3@168.124,113.135 ; J6.3@185.831,104.15 192.397,104.15 J7.3@193.655,105.408
JUI0o: J6.4 JU0.1 U6_U_sink_iref_gen5.5 | length 50.4
  Top Layer w0.25: U6_U_sink_iref_gen5.5@165.219,73.695 v1(166.52,73.695) ; v1(172.375,105.1) 172.375,74.85 JU0.1@172.65,74.575 ; JU0.1@172.825,74.797 JU0.1@173.058,74.564
  Bottom Layer w0.25: v1(166.52,73.695) 167.425,74.6 JU0.1@172.638,74.6 ; v1(172.375,105.1) 182.6,105.1 183.373,104.327 J6.4@183.654,104.327
JUI1+: J6.13 J7.13 R57.1 | length 88.6
  Top Layer w0.25: v1(121.8,84.075) v1@121.824,84.099 ; R57.1@121.824,79.474 121.8,79.499 121.8,84.051 v1@121.824,84.075 ; v1(175.575,94.725) 175.587,94.713 175.587,84.112 v1(175.6,84.1)
  Bottom Layer w0.25: v1(121.8,84.075) 175.575,84.075 v1(175.6,84.1) ; v1(175.575,94.725) 175.67,94.725 175.845,94.55 181.725,94.55 182.451,95.276 184.705,95.276 J6.13@185.654,94.327 187.098,94.327 187.35,94.075 192.288,94.075 J7.13@193.655,92.708
JUI1i: C182.1 J2.A7 J6.15 J7.15 U29.1 U32.3 | length 84.9
  Top Layer w0.25: C182.1@137.817,100.964 137.817,105.534 J2.A7@137.667,105.684 138.919,105.684 140.18,106.945 161.625,106.945 162.663,105.907 162.663,98.237 162.849,98.051 v1(167.199,98.051) ; v1(167.199,98.051) U29.1@167.198,98.684 ; v1(189.05,89) v1(189.05,97.325)
  Bottom Layer w0.25: v1@167.248,98 168.124,98 ; U32.3@168.124,98.66 168.124,98 ; J6.15@185.654,92.327 189.031,88.95 192.437,88.95 J7.15@193.655,90.168 ; v1@189.05,97.3 181.75,97.3 180.75,98.3 176.5,98.3 176.2,98 168.124,98
JUI1o: J6.16 JU1.1 U6_U_sink_iref_gen3.5 | length 87.1
  Top Layer w0.25: U6_U_sink_iref_gen3.5@121.844,73.695 v1(123.145,73.695) 123.148,73.698 123.148,83.548 v1(123.15,83.55) ; v1(176.15,83.6) v1(176.15,92.2)
  Bottom Layer w0.25: v1(123.145,73.695) 124,74.55 JU1.1@129.508,74.55 ; v1(123.15,83.55) 123.175,83.575 171.475,83.575 176.125,83.575 v1(176.15,83.6) ; v1(176.15,92.2) 176.175,92.175 183.502,92.175 J6.16@183.654,92.327
LDO_9V: 9V.1 C237.2 C238.2 R47.2 U31.10 U58.1 | length 29
  Top Layer w0.25: R47.2@82.488,165.963 82.542,166.017 82.542,166.875 82.688,167.021 83.351,167.021 83.497,167.168 83.497,167.596 84.063,168.162 U31.10@84.488,168.162
  Top Layer w0.5: 9V.1@77.4,172.55 77.4,171.874 76.575,171.049 76.575,166.53 76.868,166.238 C237.2@78.363,166.238 80.413,166.238 C238.2@80.437,166.213 80.688,165.963 R47.2@82.488,165.963
  Top Layer w1: 9V.1@77.4,172.55 82.207,177.357 U58.1@82.207,183.4
LDO_m3V: C240.2 C241.2 m3V.1 R49.2 U31.6 U59.1 | length 24
  Top Layer w0.25: U31.6@84.488,170.162 84.134,170.162 83.988,170.309 83.988,171.363 C241.2@84.513,171.888
  Top Layer w0.5: C241.2@84.563,171.888 84.675,171.775 86.5,171.775 R49.2@86.613,171.662 86.788,171.837 88.712,171.837 92.912,171.837 93.207,172.132 93.207,174.082 96.871,177.746 U59.1@96.871,183.364
NetC1_1: C1.1 C186.1 C189.1 C190.1 C193.1 C195.1 P_3.3V_EXT.1 U1.3 | length 27.3
  Layer 3 w2: U1.3@177.625,116.326 182.401,116.326 187.13,121.055 P_3.3V_EXT.1@189.415,121.055
  Bottom Layer w2: C189.1@172.8,125.8 172.8,117.649 173.972,116.478 177.473,116.478 U1.3@177.625,116.326
NetC2_source_iref1_1: C2_source_iref1.1 R8_source_iref1.1 U8_source_iref1.4 | length 4.8
  Top Layer w0.5: v1@75.708,71.57 75.714,71.564 75.729,71.564 75.735,71.57 U8_source_iref1.4@76.888,71.57
  Bottom Layer w0.5: R8_source_iref1.1@74.508,71.72 74.664,71.564 75.664,71.564 v1(75.683,71.545) 77.908,71.545 C2_source_iref1.1@78.033,71.42
NetC2_source_iref1_2: C2_source_iref1.2 R7_source_iref1.2 U8_source_iref1.1 | length 7.1
  Top Layer w0.5: U8_source_iref1.1@79.327,69.67 79.331,69.666 80.409,69.666 v1(80.425,69.65)
  Bottom Layer w0.5: R7_source_iref1.2@74.608,69.545 74.745,69.682 77.895,69.682 C2_source_iref1.2@78.033,69.82 78.183,69.669 80.406,69.669 v1(80.425,69.65)
NetC2_source_iref2_1: C2_source_iref2.1 R8_source_iref2.1 U8_source_iref2.4 | length 4.8
  Top Layer w0.5: v1@97.333,71.57 97.339,71.564 97.354,71.564 97.36,71.57 U8_source_iref2.4@98.513,71.57
  Bottom Layer w0.5: R8_source_iref2.1@96.133,71.72 96.289,71.564 97.289,71.564 v1(97.308,71.545) 99.533,71.545 C2_source_iref2.1@99.658,71.42
NetC2_source_iref2_2: C2_source_iref2.2 R7_source_iref2.2 U8_source_iref2.1 | length 7.1
  Top Layer w0.5: U8_source_iref2.1@100.952,69.67 100.956,69.666 102.034,69.666 v1(102.05,69.65)
  Bottom Layer w0.5: R7_source_iref2.2@96.233,69.545 96.37,69.682 99.52,69.682 C2_source_iref2.2@99.658,69.82 99.808,69.669 102.031,69.669 v1(102.05,69.65)
NetC2_source_iref3_1: C2_source_iref3.1 R8_source_iref3.1 U8_source_iref3.4 | length 4.8
  Top Layer w0.5: v1@119.208,71.57 119.214,71.564 119.229,71.564 119.235,71.57 U8_source_iref3.4@120.388,71.57
  Bottom Layer w0.5: R8_source_iref3.1@118.008,71.72 118.164,71.564 119.164,71.564 v1(119.183,71.545) 121.408,71.545 C2_source_iref3.1@121.533,71.42
NetC2_source_iref3_2: C2_source_iref3.2 R7_source_iref3.2 U8_source_iref3.1 | length 7.1
  Top Layer w0.5: U8_source_iref3.1@122.827,69.67 122.831,69.666 123.909,69.666 v1(123.925,69.65)
  Bottom Layer w0.5: R7_source_iref3.2@118.108,69.545 118.245,69.682 121.395,69.682 C2_source_iref3.2@121.533,69.82 121.683,69.669 123.906,69.669 v1(123.925,69.65)
NetC2_source_iref4_1: C2_source_iref4.1 R8_source_iref4.1 U8_source_iref4.4 | length 4.8
  Top Layer w0.5: v1@140.858,71.57 140.864,71.564 140.879,71.564 140.885,71.57 U8_source_iref4.4@142.038,71.57
  Bottom Layer w0.5: R8_source_iref4.1@139.658,71.72 139.814,71.564 140.814,71.564 v1(140.833,71.545) 143.058,71.545 C2_source_iref4.1@143.183,71.42
NetC2_source_iref4_2: C2_source_iref4.2 R7_source_iref4.2 U8_source_iref4.1 | length 7.1
  Top Layer w0.5: U8_source_iref4.1@144.477,69.67 144.481,69.666 145.559,69.666 v1(145.575,69.65)
  Bottom Layer w0.5: R7_source_iref4.2@139.758,69.545 139.895,69.682 143.045,69.682 C2_source_iref4.2@143.183,69.82 143.333,69.669 145.556,69.669 v1(145.575,69.65)
NetC2_source_iref5_1: C2_source_iref5.1 R8_source_iref5.1 U8_source_iref5.4 | length 4.6
  Top Layer w0.5: v1@162.583,71.57 162.589,71.564 162.604,71.564 162.61,71.57 U8_source_iref5.4@163.763,71.57
  Bottom Layer w0.5: R8_source_iref5.1@161.539,71.564 162.539,71.564 v1(162.558,71.545) 164.783,71.545 C2_source_iref5.1@164.908,71.42
NetC2_source_iref5_2: C2_source_iref5.2 R7_source_iref5.2 U8_source_iref5.1 | length 7.1
  Top Layer w0.5: U8_source_iref5.1@166.202,69.67 166.206,69.666 167.284,69.666 v1(167.3,69.65)
  Bottom Layer w0.5: R7_source_iref5.2@161.483,69.545 161.62,69.682 164.77,69.682 C2_source_iref5.2@164.908,69.82 165.058,69.669 167.281,69.669 v1(167.3,69.65)
NetC2_source_iref_01_1: C2_source_iref_01.1 R8_source_iref_01.1 U8_source_iref_01.4 | length 4.8
  Top Layer w0.5: v1@85.908,71.57 85.914,71.564 85.929,71.564 85.935,71.57 U8_source_iref_01.4@87.088,71.57
  Bottom Layer w0.5: R8_source_iref_01.1@84.708,71.72 84.864,71.564 85.864,71.564 v1(85.883,71.545) 88.108,71.545 C2_source_iref_01.1@88.233,71.42
NetC2_source_iref_01_2: C2_source_iref_01.2 R7_source_iref_01.2 U8_source_iref_01.1 | length 7.1
  Top Layer w0.5: U8_source_iref_01.1@89.527,69.67 89.531,69.666 90.609,69.666 v1(90.625,69.65)
  Bottom Layer w0.5: R7_source_iref_01.2@84.808,69.545 84.945,69.682 88.095,69.682 C2_source_iref_01.2@88.233,69.82 88.383,69.669 90.606,69.669 v1(90.625,69.65)
NetC2_source_iref_02_1: C2_source_iref_02.1 R8_source_iref_02.1 U8_source_iref_02.4 | length 4.8
  Top Layer w0.5: v1@107.658,71.57 107.664,71.564 107.679,71.564 107.685,71.57 U8_source_iref_02.4@108.838,71.57
  Bottom Layer w0.5: R8_source_iref_02.1@106.458,71.72 106.614,71.564 107.614,71.564 v1(107.633,71.545) 109.858,71.545 C2_source_iref_02.1@109.983,71.42
NetC2_source_iref_02_2: C2_source_iref_02.2 R7_source_iref_02.2 U8_source_iref_02.1 | length 7.1
  Top Layer w0.5: U8_source_iref_02.1@111.277,69.67 111.281,69.666 112.359,69.666 v1(112.375,69.65)
  Bottom Layer w0.5: R7_source_iref_02.2@106.558,69.545 106.695,69.682 109.845,69.682 C2_source_iref_02.2@109.983,69.82 110.133,69.669 112.356,69.669 v1(112.375,69.65)
NetC2_source_iref_03_1: C2_source_iref_03.1 R8_source_iref_03.1 U8_source_iref_03.4 | length 4.8
  Top Layer w0.5: v1@129.333,71.567 129.339,71.561 129.355,71.561 129.36,71.567 U8_source_iref_03.4@130.514,71.567
  Bottom Layer w0.5: R8_source_iref_03.1@128.133,71.717 128.289,71.561 129.289,71.561 v1(129.308,71.542) 131.533,71.542 C2_source_iref_03.1@131.658,71.417
NetC2_source_iref_03_2: C2_source_iref_03.2 R7_source_iref_03.2 U8_source_iref_03.1 | length 7.1
  Top Layer w0.5: U8_source_iref_03.1@132.953,69.667 132.957,69.663 134.035,69.663 v1(134.05,69.648)
  Bottom Layer w0.5: R7_source_iref_03.2@128.233,69.542 128.371,69.68 131.521,69.68 C2_source_iref_03.2@131.658,69.817 131.808,69.667 134.031,69.667 v1(134.05,69.648)
NetC2_source_iref_04_1: C2_source_iref_04.1 R8_source_iref_04.1 U8_source_iref_04.4 | length 4.8
  Top Layer w0.5: v1@151.033,71.57 151.039,71.564 151.054,71.564 151.06,71.57 U8_source_iref_04.4@152.213,71.57
  Bottom Layer w0.5: R8_source_iref_04.1@149.833,71.72 149.989,71.564 150.989,71.564 v1(151.008,71.545) 153.233,71.545 C2_source_iref_04.1@153.358,71.42
NetC2_source_iref_04_2: C2_source_iref_04.2 R7_source_iref_04.2 U8_source_iref_04.1 | length 7.1
  Top Layer w0.5: U8_source_iref_04.1@154.652,69.67 154.656,69.666 155.734,69.666 v1(155.75,69.65)
  Bottom Layer w0.5: R7_source_iref_04.2@149.933,69.545 150.07,69.682 153.22,69.682 C2_source_iref_04.2@153.358,69.82 153.508,69.669 155.731,69.669 v1(155.75,69.65)
NetC5_1: C5.1 C6.1 C7.1 C11.1 C96.1 C97.1 P_CORE.1 U52.3 | length 16.1
  Bottom Layer w1: C7.1@129.358,193.764 129.358,186.174 U52.3@132.142,183.389 132.075,183.322 132.075,178.907 C11.1@132.008,178.84
NetC8_1: C8.1 C9.1 C10.1 C98.1 C99.1 C100.1 P_PLL.1 U53.3 | length 16
  Bottom Layer w1: C98.1@99.772,193.764 99.772,186.019 U53.3@102.401,183.39 ; C10.1@102.374,178.867 U53.3@102.374,183.362
NetC22_1: C22.1 U2.8 | length 3.8
  Top Layer w0.25: U2.8@136.133,167.992 136.133,167.18 136.392,166.921 138.015,166.921 138.14,166.796 138.19,166.796 138.715,166.271 C22.1@138.715,166.221
NetC23_2: C23.2 C24.2 R10.1 U2.9 U2.10 U2.11 U2.12 U2.13
NetC25_1: C25.1 L1.1 U4.6 | length 3.3
  Top Layer w0.25: C25.1@116.65,163.125 117.085,163.56 L1.1@118.122,163.56
  Top Layer w0.5: U4.6@116.547,164.715 116.55,164.715 116.65,164.614 C25.1@116.65,163.125
NetC25_2: C25.2 U4.5 | length 1.6
  Top Layer w0.25: C25.2@115.05,163.125 115.123,163.198 115.123,164.054 115.135,164.065 U4.5@115.135,164.702
NetC28_1: C28.1 U5.8 | length 4.2
  Top Layer w0.25: U5.8@136.09,159.748 136.092,159.746 136.092,158.884 136.239,158.738 136.746,158.738 136.892,158.592 136.892,157.993 137.039,157.846 C28.1@138.665,157.846
NetC29_2: C29.2 R16.1 U4.7 | length 3.8
  Top Layer w0.25: U4.7@117.96,164.702 119.127,164.702 R16.1@119.575,165.15 ; R16.1@119.575,165.1 119.575,163.337 C29.2@119.747,163.164
NetC30_2: C30.2 C31.2 R18.1 U5.9 U5.10 U5.11 U5.12 U5.13
NetC32_2: C32.2 U4.15 | length 3.2
  Top Layer w0.25: C32.2@114.372,169.99 114.372,168.914 114.547,168.739 115.622,168.739 115.797,168.565 U4.15@115.797,167.99
NetC43_1: C43.1 R17.2 U6.7 U6.8 | length 5.2
  Top Layer w0.25: C43.1@173.8,172.375 173.85,172.325 173.95,172.325 174.536,172.325 ; U6.8@174.036,170.679 C43.1@174.036,172.139 ; U6.7@174.536,170.679 174.536,172.325 ; R17.2@175.825,172.325 174.536,172.325
NetC46_1: C46.1 L2.1 U7.6 | length 3.3
  Top Layer w0.25: C46.1@185.371,167.586 186.896,167.586 U7.6@186.946,167.536 ; C46.1@185.458,167.673 185.796,167.336 L2.1@185.796,166.136
NetC46_2: C46.2 U7.5 | length 1.7
  Top Layer w0.25: C46.2@185.371,169.361 185.783,168.948 U7.5@186.933,168.948